# EAGLE board LiPo Booster v1.1 (EAGLE 6.5.0)
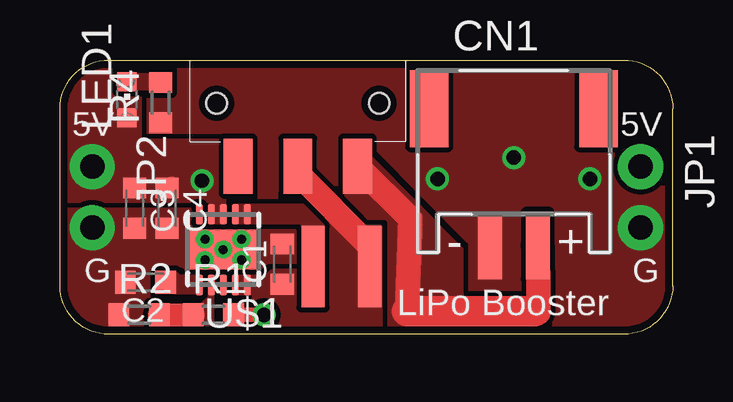
[diagram p0: board, top side]
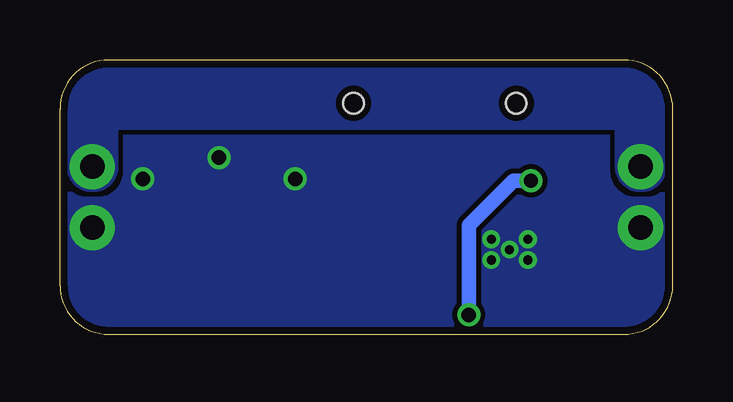
[diagram p1: board, bottom side, seen from below]

Size 25.55 x 11.43 mm. Coordinates in mm from the lower left corner, seen from the top.
Outline: 2.03,11.43 23.52,11.43 arc-90 25.55,9.4 25.55,2.03 arc-90 23.52,0 2.03,0 arc-90 0,2.03 0,9.4 arc-90 2.03,11.43
Copper layers (1*16): Top 0.0356mm / dielectric 1.5011mm / Bottom 0.0356mm
Design rules "LaenPCBOrder *": minimum track width 6mil, minimum drill 13mil, track to track 8mil, track to pad 8mil, pad to pad 8mil, via to via 8mil, smd to smd 8mil, copper to edge 12mil, drill to drill 6mil, minimum pad ring 7mil, minimum via ring 7mil, stop-mask expansion 0mil, vias tented up to drill 30mil, thermal gap 10mil

## Footprints (pad centres in the part's own frame; a part is rotated, then mirrored left to right if it is on the bottom)
C0603K = smd 0.864 x 0.965: 1 -0.838,0; 2 0.838,0
JST-PH-2-SMT-RA = smd 1 x 2.8: 1 1,-4.3; 2 -1,-4.3 | smd 1.6 x 3.2: 3 3.527,1.4; 4 -3.527,1.4
1X02_NO_SILK = drill 1.016 pad 1.88: 1 0,0; 2 2.54,0
XFL4020 = smd 0.965 x 3.404: P$1 -1.181,0; P$2 1.181,0
CHIPLED_0603 = smd 0.8 x 0.8: A 0,-0.75; C 0,0.75
R0603 = smd 0.864 x 0.965: 1 -0.838,0; 2 0.838,0
DRC-S-PVSON-N11 = smd 0.28 x 0.85: 1 -1,-1.475; 2 -0.5,-1.475; 3 0,-1.475; 4 0.5,-1.475; 5 1,-1.475; 6 1,1.475; 7 0.5,1.475; 8 0,1.475; 9 -0.5,1.475; 10 -1,1.475 | smd 3.099 x 1.65: GND 0,0 | drill 0.381 pad 0.559: GND@1 0,0; GND@2 -0.762,0.432; GND@3 -0.762,-0.432; GND@4 0.762,0.432; GND@5 0.762,-0.432
JS102011 = smd 1.194 x 2.286: P$1 2.489,1.143; P$2 0,1.143; P$3 -2.489,1.143 | hole 0.85: 3.391,-1.473; -3.391,-1.473

## Placement (x,y rotation side)
C1  22uF  [C0603K]  9.27,2.92 90 top
C2  10nF  [C0603K]  3.57,2.17 180 top
C3  22uF  [C0603K]  3.11,5.26 270 top
C4  22uF  [C0603K]  4.47,5.26 270 top
CN1  [JST-PH-2-SMT-RA]  18.92,8 0 top
JP1  M021X02_NO_SILK  [1X02_NO_SILK]  24.21,6.99 270 top
JP2  M021X02_NO_SILK  [1X02_NO_SILK]  1.35,6.99 270 top
L1  1uH  [XFL4020]  11.73,2.82 180 top
LED1  [CHIPLED_0603]  2.79,9.77 0 top
R1  402k  [R0603]  6.4,0.81 0 top
R2  100k  [R0603]  3.3,0.81 0 top
R4  1k  [R0603]  4.19,9.65 90 top
U$1  TPS61230  [DRC-S-PVSON-N11]  6.81,3.53 180 top
U$2  SWITCH-SPDT  [JS102011]  9.92,8.15 180 top

## Library data of the parts
C1-C4 CN1 LED1 R1 R2 R4 = adafruit
JP1 JP2 = SparkFun-Connectors
L1 = Coilcraft
U$1 = texas
U$2 = C&K Components

## Nets
GND: C1.2 C2.2 C3.2 C4.2 CN1.2 JP1.2 JP2.2 R2.1 R4.1 U$1.GND U$1.GND@1 U$1.GND@2 U$1.GND@3 U$1.GND@4 U$1.GND@5
IND: L1.P$2 U$1.1 U$1.2
N$2: LED1.C R4.2
N$3: C2.1 U$1.6
N$6: R1.1 R2.2 U$1.7
N$7: CN1.1 U$2.P$3
PG: U$1.5
VIN: C1.1 L1.P$1 U$1.9 U$1.10 U$2.P$2
VOUT: C3.1 C4.1 JP1.1 JP2.1 LED1.A R1.2 U$1.3 U$1.4

## Tracks (layer width: path | path; a pad name or v marks a point on that pad's centre or on a via)
GND  (via drill 0.6)
  other vias: 15.75,6.48 22.1,6.48 18.92,7.37
  pour Top (rank 6, no thermals): -2.54,13.97 27.94,13.97 27.94,-2.54 -2.54,-2.54
  pour Bottom (rank 2, no thermals): -1.27,12.7 26.67,12.7 26.67,-1.27 -1.27,-1.27
IND
  pour Top (no thermals): 7.29,5.31 7.29,4.71 10.05,4.71 10.2,4.56 10.2,4.37 10.91,4.37 10.91,4.7 10.3,5.31
N$2
  pour Top (no thermals): 2.57,10.77 4.15,10.77 4.15,10.28 2.56,10.28
N$3
  pour Top (no thermals): 5.84,2.36 4.99,2.36 4.79,2.51 4.79,1.8 5.84,1.8
N$6
  Top 0.965: R2.2 R1.1
  pour Top (no thermals): 5.08,1.17 5.91,1.17 6.3,1.55 6.3,1.84 6.31,1.84 6.31,0.46 5.08,0.46
N$7
  Top 1.016: CN1.1 19.94,1.63 19.94,0.9 19.8,0.95 | 14.48,0.95 14.61,4.81 U$2.P$3
  Top 1.27: 19.8,0.95 14.48,0.95
  pour Top (rank 4, no thermals): 12.01,0 16.73,0 16.73,3.51 12.93,7.33 11.94,7.33
VIN
  Top 0.813: 12.88,3.72 12.88,2.86 L1.P$1
  Top 1.016: U$2.P$2 9.92,6.68 12.88,3.72
  pour Top (rank 3, no thermals): 7.29,2.35 7.29,1.75 8.12,1.75 8.12,0 13.34,0 13.34,4.45 12.19,4.45 11.81,4.83 11.26,4.84 11.26,0.8 9.98,0.79 9.98,2.6 8.86,2.6 8.61,2.35
VOUT  (via drill 0.6)
  Top 0.61: 7.22,0.89 R1.2 v8.51,0.81 | 4.66,6.27 C4.1
  Bottom 0.61: v5.92,6.4 6.66,6.4 8.51,4.55 v8.51,0.81
  pour Bottom (no thermals): 2.03,11.43 arc90 0,9.4 arc-90 0.38,9.02 0.38,6.99 arc180 2.29,6.99 2.29,8.64 23.24,8.64 23.24,6.99 arc180 25.15,6.99 25.15,8.89 arc-90 25.65,9.4 arc90 23.62,11.43
  pour Top (rank 2, no thermals): 6.79,4.71 6.87,8.03 3.3,8.03 3.3,11.43 0.09,11.43 0.09,5.6 6.3,5.6 6.3,4.71

## Text on the board
tPlace: 5V | 5V | G | G | LiPo Booster